# Altium PCB isokey_left.PcbDoc (part 5 of 5)
Units mm, origin at the board's own origin, x right, y up, seen from the top; angles counter-clockwise.
Board outline 154.06 x 134.15 mm, 2 copper layers (Top Layer, Bottom Layer), stack 1.569 mm thick; 140 components, 88 nets, 412 pads, 257 vias.
Unrouted connection lines stored in the file: 18.
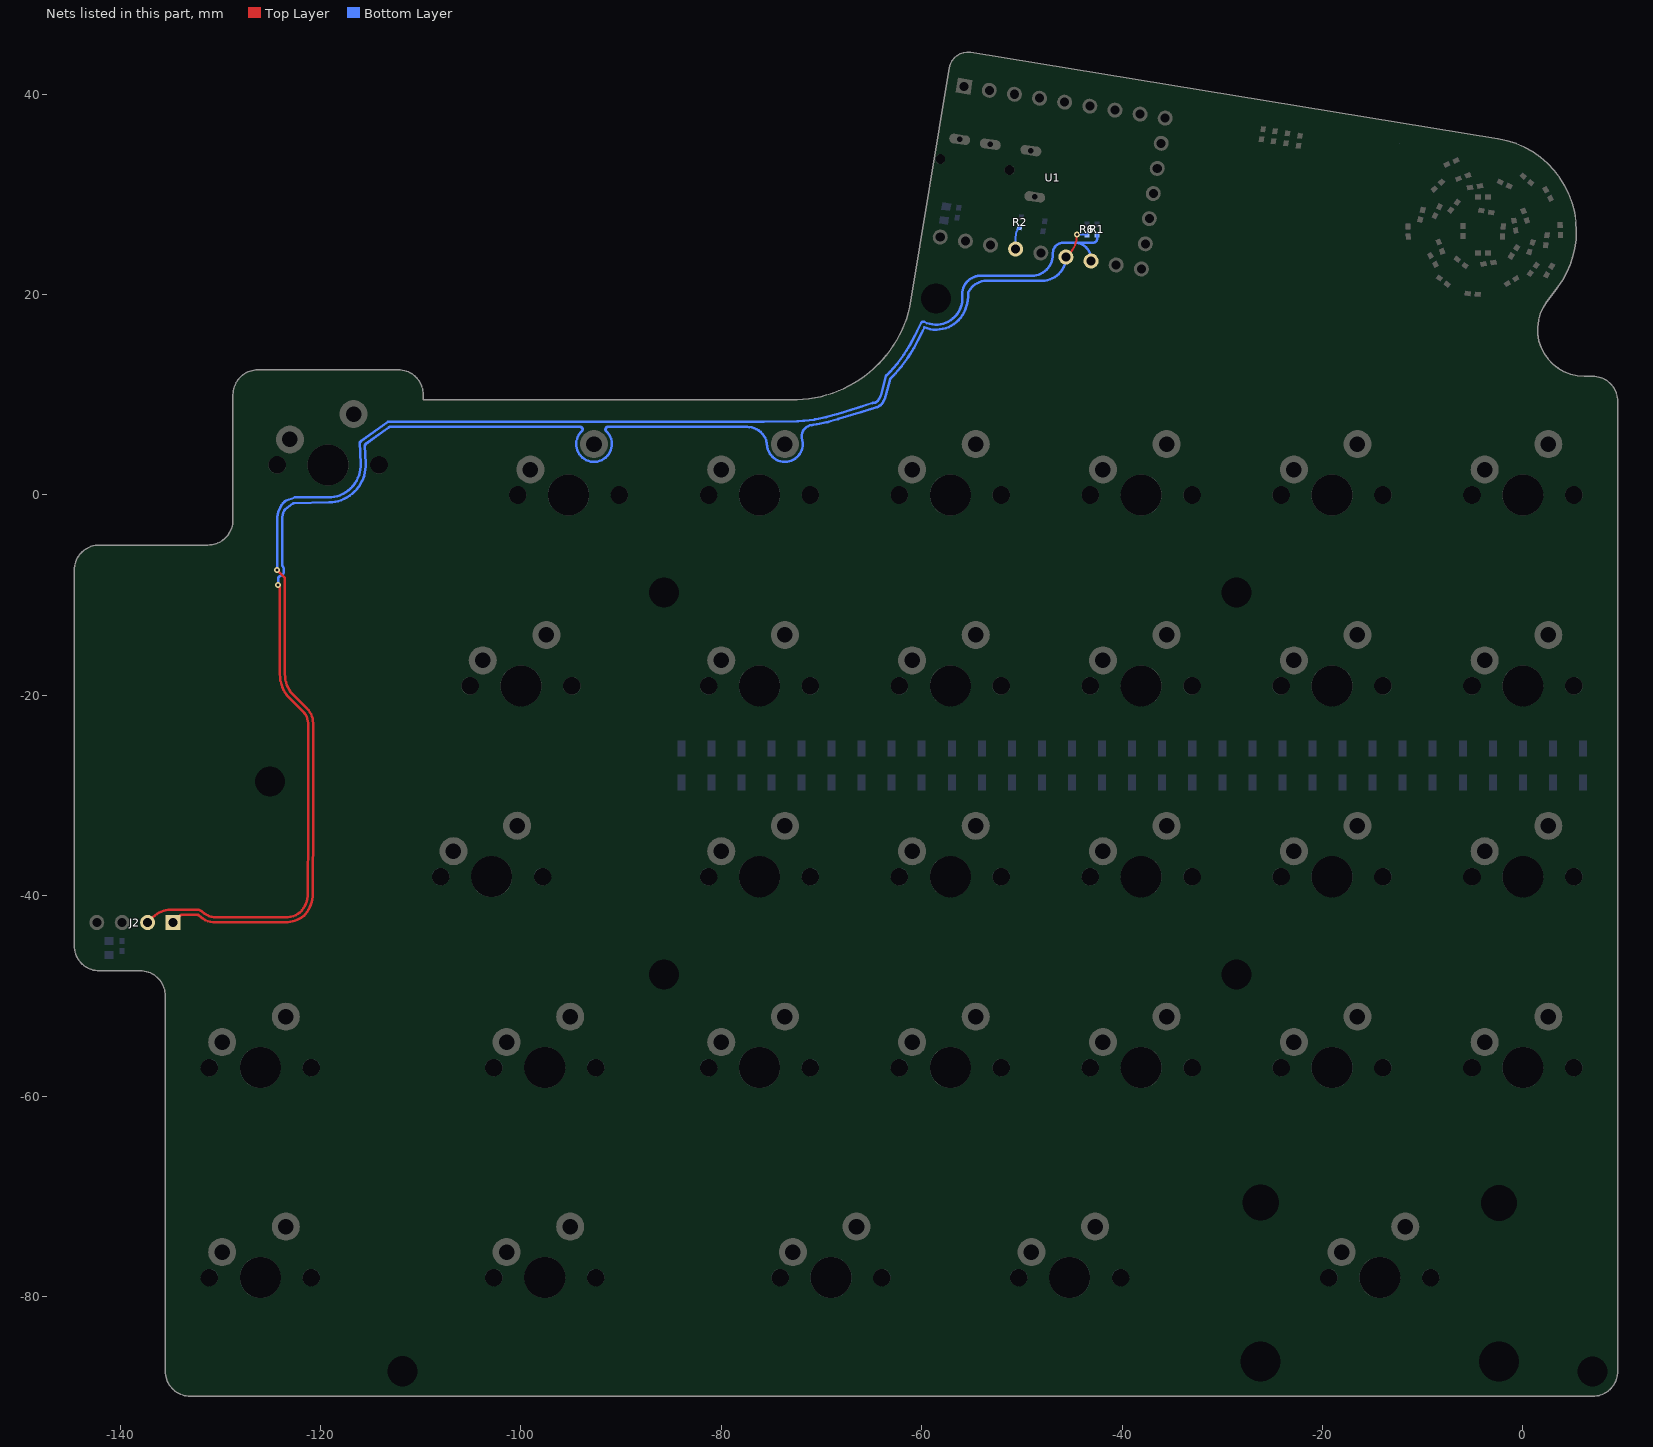
[diagram p5: the nets of this part, all layers, seen from the top]

## Via types
v1: diameter 0.6, hole 0.3, Top Layer to Bottom Layer, 257 vias

## Nets (pads, with @x,y where several pads share a name; then routed paths per layer and width w, separated by ;. In a path a pad name is that pad's centre, name@x,y a point inside that pad or via, vN(x,y) a via of type N, cw(c..) or ccw(c..) an arc to the next point about the centre after c; other vN are vias at no path point) (continued)
SCL1: J2.2 R6.1 U1.17 | length 164.7
  Top Layer w0.2: U1.17@-45.609,23.752 -45.269,24.092 ccw(c-47.065,25.888) -44.525,25.888 v1(-44.525,26)
  Top Layer w0.25: J2.2@-137.259,-42.671 -136.732,-42.144 cw(c-134.936,-43.94) -134.936,-41.4 -132.283,-41.4 cw(c-132.283,-42.083) -131.8,-41.6 ccw(c-130.47,-40.27) -130.47,-42.151 -123.54,-42.151 ccw(c-123.54,-39.611) -122.026,-41.65 ; v1(-124.25,-9) cw(c-124.709,-9.459) -124.06,-9.459 -124.06,-17.888 ccw(c-120.52,-17.888) -123.388,-19.962 ccw(c-122.983,-19.67) -123.387,-19.964 ; -123.387,-19.965 ccw(c-122.983,-19.67) -123.385,-19.967 ccw(c-122.579,-19.375) -123.288,-20.08 ; -123.287,-20.081 -121.619,-21.758 cw(c-121.796,-21.934) -121.604,-21.774 cw(c-122.79,-22.756) -121.25,-22.756 -121.25,-34.082 -121.286,-38.944 ; -122.062,-41.677 -122.03,-41.645 ccw(c-123.826,-39.849) -121.295,-40.061 ccw(c-121.544,-40.04) -121.294,-40.043 -121.286,-38.949
  Bottom Layer w0.2: v1(-44.525,26) R6.1@-43.5,26
  Bottom Layer w0.25: v1(-124.25,-9) -124.25,-8.363 cw(c-124,-8.364) -124.09,-8.131 ccw(c-124.33,-7.5) -123.783,-7.104 cw(c-123.58,-6.959) -123.83,-6.96 -123.83,-2.447 cw(c-121.79,-2.447) -123.613,-1.532 -123.612,-1.53 cw(c-123.391,-1.646) -123.544,-1.448 -122.792,-0.868 -122.756,-0.854 cw(c-122.67,-1.089) -122.676,-0.839 -119.154,-0.749 ccw(c-119.25,3) -116.598,0.348 ccw(c-119.25,3) -115.503,3.15 -115.572,4.903 cw(c-115.322,4.912) -115.467,5.115 -114.478,5.825 -113.185,6.753 cw(c-113.04,6.55) -113.04,6.8 -94.102,6.8 cw(c-94.103,6.55) -93.93,6.369 ccw(c-92.71,5.08) -91.49,6.369 cw(c-91.317,6.55) -91.318,6.8 -77.438,6.8 cw(c-77.438,4.77) -75.537,5.484 cw(c-75.772,5.397) -75.525,5.44 -75.408,4.773 ; -75.408,4.77 cw(c-73.66,5.08) -75.408,4.773 ; -70.472,7.067 -70.81,7 ccw(c-70.81,5.814) -71.996,5.814 ccw(c-71.746,5.814) -71.99,5.762 -71.924,5.449 cw(c-73.66,5.08) -71.996,4.463 cw(c-73.66,5.08) -73.66,3.305 cw(c-73.66,5.08) -75.408,4.773 ; -70.471,7.068 -69.511,7.261 ccw(c-69.609,7.751) -69.509,7.261 ; -69.508,7.261 ccw(c-70.027,9.834) -69.304,7.311 ; -69.301,7.312 -68.359,7.583 ccw(c-68.497,8.063) -68.357,7.583 ; -68.356,7.583 ccw(c-69.084,10.105) -68.33,7.591 ccw(c-68.473,8.07) -68.329,7.591 -66.092,8.263 ccw(c-66.236,8.742) -66.089,8.264 -64.526,8.743 ccw(c-64.87,9.867) -64.355,8.811 ccw(c-64.87,9.867) -63.82,9.34 -63.692,9.595 ccw(c-65.144,10.324) -63.573,9.911 -63.138,11.559 cw(c-62.896,11.495) -63.074,11.671 -62.818,11.927 ccw(c-63.17,12.282) -62.794,11.953 -62.615,12.157 -62.363,12.445 -62.11,12.734 ccw(c-63.521,13.969) -62.013,12.855 ; -62.013,12.855 -61.431,13.642 ccw(c-62.938,14.758) -61.343,13.772 -60.829,14.601 ccw(c-62.421,15.592) -60.763,14.715 -59.988,16.177 ccw(c-60.429,16.411) -59.978,16.196 -59.876,16.41 -59.727,16.723 ccw(c-58.572,19.627) -55.661,18.49 ccw(c-59.794,20.104) -55.357,20.12 ccw(c-59.794,20.104) -55.357,20.122 cw(c-55.107,20.121) -55.337,20.217 cw(c-53.638,19.498) -54.68,21.02 cw(c-53.517,19.321) -53.517,21.38 -47.981,21.38 ccw(c-47.981,23.752) U1.17@-45.609,23.752
SDA1: J2.1 R1.1 U1.16 | length 156.2
  Top Layer w0.25: J2.1@-134.719,-42.671 -134.021,-41.973 cw(c-133.845,-42.15) -133.845,-41.9 -132.309,-41.9 cw(c-132.31,-42.15) -132.136,-41.971 ccw(c-130.47,-40.27) -130.47,-42.651 -123.54,-42.651 ccw(c-123.54,-39.611) -122.56,-42.489 ccw(c-123.54,-39.611) -121.726,-42.05 ccw(c-122.026,-41.65) -121.647,-41.976 -121.526,-41.837 ccw(c-123.826,-39.849) -120.797,-40.104 ccw(c-121.544,-40.04) -120.796,-40.102 ; v1(-124.33,-7.5) -123.633,-8.197 cw(c-123.81,-8.374) -123.56,-8.374 -123.56,-17.888 ccw(c-120.52,-17.888) -122.983,-19.67 ccw(c-122.579,-19.375) -122.933,-19.728 -122.647,-20.015 -121.345,-21.317 cw(c-122.79,-22.756) -120.75,-22.756 -120.75,-34.082 cw(c-121.25,-34.082) -120.75,-34.086 -120.78,-38.091 ; -120.796,-40.101 ccw(c-121.295,-40.061) -120.796,-40.099 ccw(c-121.544,-40.04) -120.794,-40.045 -120.786,-38.953 ccw(c-121.286,-38.949) -120.786,-38.949 -120.78,-38.096
  Bottom Layer w0.25: v1(-124.33,-7.5) -124.33,-2.447 cw(c-121.79,-2.447) -123.586,-0.651 cw(c-121.79,-2.447) -123.584,-0.649 cw(c-123.409,-0.827) -123.495,-0.592 -122.56,-0.25 -119.25,-0.25 ccw(c-119.25,3) -116.27,1.703 ccw(c-119.25,3) -116.003,3.13 -116.086,5.259 -116.008,5.338 cw(c-115.832,5.161) -115.978,5.364 ; -115.978,5.364 -113.287,7.296 -113.213,7.3 cw(c-113.201,7.05) -113.201,7.3 -75.763,7.3 -72.404,7.376 ccw(c-72.452,9.5) -72.337,7.378 ccw(c-72.369,8.002) -72.335,7.378 -71.845,7.405 ; -71.844,7.405 ccw(c-71.921,8.778) -71.841,7.406 ccw(c-71.963,9.527) -71.719,7.416 ccw(c-71.875,8.782) -71.717,7.416 ccw(c-71.788,8.037) -71.715,7.416 -70.741,7.531 ccw(c-70.814,8.151) -70.739,7.531 ccw(c-70.901,8.896) -70.738,7.531 ccw(c-70.988,9.641) -70.571,7.557 ccw(c-70.693,8.171) -70.57,7.558 -69.609,7.751 ccw(c-69.732,8.364) -69.607,7.751 ccw(c-70.027,9.834) -69.442,7.791 ; -69.44,7.792 -68.497,8.063 ; -68.495,8.064 ccw(c-69.084,10.105) -68.473,8.07 -66.236,8.742 -64.953,9.178 cw(c-64.872,8.942) -64.872,9.192 ccw(c-64.87,9.867) -64.266,9.565 -64.139,9.82 ccw(c-65.144,10.324) -64.057,10.037 -63.587,11.817 cw(c-63.345,11.753) -63.523,11.929 -63.17,12.282 -62.487,13.063 ; -62.486,13.064 ccw(c-63.521,13.969) -62.415,13.152 -61.833,13.939 ccw(c-62.938,14.758) -61.768,14.035 -61.511,14.45 -61.253,14.865 ccw(c-62.421,15.592) -61.205,14.949 -60.429,16.411 -60.068,17.169 -60.014,17.223 cw(c-59.838,17.046) -59.729,17.27 ccw(c-58.572,19.627) -55.971,19.269 ccw(c-58.572,19.627) -55.969,19.969 cw(c-55.721,20) -55.971,19.999 -55.971,20.024 cw(c-54.114,20.024) -54.799,21.749 -54.607,21.826 cw(c-54.327,21.13) -54.339,21.88 cw(c-54.331,21.38) -54.338,21.88 ; -54.337,21.88 cw(c-54.305,19.34) -54.305,21.88 -49.028,21.88 ccw(c-49.028,23.998) -46.91,23.998 -46.91,24.149 cw(c-45.87,24.149) -45.87,25.189 -44.75,25.189 ; U1.16@-43.1,23.355 -43.1,23.539 ccw(c-44.75,23.539) -44.75,25.189 ; R1.1@-42.5,26 -42.5,25.559 cw(c-42.87,25.559) -42.87,25.189 -44.75,25.189
SERIAL: R2.1 U1.19 | length 2.3
  Bottom Layer w0.2: U1.19@-50.626,24.547 -50.626,25.77 cw(c-49.269,25.77) R2.1@-50.229,26.729
pads on no net: J1.Un1 J1.Un2 K00_S1.Hole K01_S1.Hole K02_S1.Hole K03_S1.Hole K10_S1.Hole K11_S1.Hole K12_S1.Hole K13_S1.Hole K14_S1.Hole K20_S1.Hole K21_S1.Hole K22_S1.Hole K23_S1.Hole K24_S1.Hole K30_S1.Hole K31_S1.Hole K32_S1.Hole K33_S1.Hole K40_S1.Hole K41_S1.Hole K42_S1.Hole K43_S1.Hole K44_S1.Hole K50_S1.Hole K51_S1.Hole K52_S1.Hole K53_S1.Hole K54_S1.Hole K60_S1.Hole K63_S1.Hole K64_S1.Hole U1.12 U1.13

## Silkscreen, mask and mechanical layers (free items; w line width, h text height)
Top Overlay:
  drawing of 53 lines, arcs and shapes, not listed
  text "v5.1" at -32.507,24.578 h0.55
  text "s" at -32.457,22.245 h2.05
  text "o" at -30.502,22.245 h2.05
  text "I" at -34.178,22.224 h2.05
  text "e" at -32.416,20.028 h2.05
  text "K" at -34.178,20.008 h2.05
  text "y" at -30.433,20.003 h2.05
  text "iso" at -128.074,-19.404 h4.11
  text "K" at -121.5,-20.5 h5.48
  text "Split!" at -125.25,-26.44 h4.5
  text "v5.1" at -126.512,-26.5 h3.5 r90
  text ".prj_name / .prj_status" at -130.25,-41.25 h2
  text "REV..prj_pcb" at 2.75,-79.25 h1.2 r270
  text "D" at 5.661,-80.894 h0.8
  text "B" at 5.661,-83.896 h0.8
Bottom Overlay:
  drawing of 52 lines, arcs and shapes, not listed
  text "v5.1" at -51.727,38.975 h0.32
  text "o" at -52.887,37.626 h1.18
  text "s" at -51.757,37.626 h1.18
  text "I" at -50.761,37.614 h1.18
  text "y" at -52.927,36.33 h1.18
  text "e" at -51.78,36.344 h1.18
  text "K" at -50.761,36.332 h1.18
  text "iso" at -119.594,-24.28 h7.87
  text "K" at -132.18,-26.377 h10.49
  text "Split!" at -125,-37.75 h8.62
  text "v5.1" at -122.585,-37.865 h6.7 r270
  text ".prj_name / .prj_status" at -115.3,-48.9 h2
  text "B" at 4.911,-79.354 h0.8 r180
  text "REV..prj_pcb" at 3.25,-79.5 h1.2 r90
  text "D" at 4.911,-82.356 h0.8 r180
Outline:
  lines w0.15: -142.1,-47.49 -138,-47.49 cw(c-138,-49.99) -135.5,-49.99 -135.5,-87.462 ccw(c-133,-87.462) -133,-89.962 6.969,-89.962 ccw(c6.969,-87.462) 9.469,-87.462 9.469,9.35 ccw(c6.969,9.35) 6.969,11.85 6.116,11.85 5.433,11.901 4.764,12.051 4.124,12.298 3.528,12.637 2.988,13.06 2.516,13.557 2.122,14.119 1.816,14.732 1.602,15.384 1.487,16.06 1.473,16.745 1.559,17.425 1.745,18.085 2.026,18.711 2.395,19.289 3.481,20.737 3.964,21.447 4.38,22.199 4.725,22.985 4.996,23.8 5.191,24.636 5.309,25.487 5.349,26.344 5.301,27.284 5.16,28.214 4.926,29.124 4.601,30.007 4.19,30.853 3.696,31.653 3.123,32.399 2.479,33.085 1.769,33.702 1.001,34.244 0.182,34.707 -0.68,35.084 -1.575,35.374 -2.494,35.572 -55.115,44.167 -55.476,44.19 -55.835,44.142 -56.178,44.025 -56.492,43.844 -56.764,43.605 -56.984,43.317 -57.144,42.992 -57.238,42.642 -61.18,18.781 cw(c-72.87,21.493) -72.452,9.5 -109.751,9.5 -109.751,10 ccw(c-112.251,10) -112.251,12.5 -126.245,12.5 ; -142.1,-5 -131.25,-5 ccw(c-131.25,-2.5) -128.75,-2.5 -128.75,9.995 ; -142.088,-47.49 cw(c-142.088,-44.99) -144.588,-44.99 -144.588,-7.5 cw(c-142.088,-7.5) -142.088,-5 ; -128.745,9.995 cw(c-126.245,9.995) -126.245,12.495
Drawing:
  lines w0.15: -128.75,-4 -126.25,-4 -126.25,-6.499
Assembly Top:
  text "'.Layer_Name'" at 413.3,-210.934 h5
Assembly Bottom:
  text "'.Layer_Name'" at 153.114,-211.342 h5
Note Top:
  text "'.Layer_Name'" at 413.3,-210.934 h5
Note Bottom:
  text "'.Layer_Name'" at 153.114,-211.175 h5
PCB_Note:
  drawing of 367 lines, arcs and shapes, not listed
  text "REV:" at 95.914,85.574 h0.8
  text "DWG. NO." at 71.354,85.495 h0.8
  text "1" at -246.049,85.112 h1.2
  text "2" at -219.049,85.112 h1.2
  text "3" at -194.049,85.112 h1.2
  text "4" at -169.049,85.112 h1.2
  text "5" at -144.049,85.112 h1.2
  text "6" at -119.049,85.112 h1.2
  text "7" at -94.049,85.112 h1.2
  text "8" at -67.049,85.112 h1.2
  text "9" at -38.049,85.112 h1.2
  text "10" at -13.049,85.112 h1.2
  text "11" at 11.951,85.112 h1.2
  text "12" at 36.951,85.112 h1.2
  text "13" at 61.951,85.112 h1.2
  text "15" at 111.951,85.112 h1.2
  text "16" at 141.951,85.112 h1.2
  text ".prj_pcb" at 96.164,84.074 h1.27
  text ".PCB_DWG_NO" at 74.664,83.824 h1.27
  text "T" at -257.031,81.486 h1.3
  text "H" at -255.93,81.486 h1.3
  text "I" at -254.66,81.486 h1.3
  text "S" at -254.152,81.486 h1.3
  text "D" at -252.5,81.486 h1.3
  text "O" at -251.23,81.486 h1.3
  text "C" at -249.833,81.486 h1.3
  text "U" at -248.562,81.486 h1.3
  text "M" at -247.292,81.486 h1.3
  text "E" at -245.81,81.486 h1.3
  text "N" at -244.624,81.486 h1.3
  text "T" at -243.396,81.486 h1.3
  text "A" at -241.787,81.486 h1.3
  text "N" at -240.602,81.486 h1.3
  text "D" at -239.331,81.486 h1.3
  text "T" at -237.595,81.486 h1.3
  text "H" at -236.494,81.486 h1.3
  text "E" at -235.224,81.486 h1.3
  text "D" at -233.573,81.486 h1.3
  text "A" at -232.302,81.486 h1.3
  text "T" at -231.117,81.486 h1.3
  text "A" at -230.058,81.486 h1.3
  text "D" at -228.364,81.486 h1.3
  text "I" at -227.094,81.486 h1.3
  text "S" at -226.628,81.486 h1.3
  text "C" at -225.443,81.486 h1.3
  text "L" at -224.172,81.486 h1.3
  text "O" at -223.198,81.486 h1.3
  text "S" at -221.801,81.486 h1.3
  text "E" at -220.615,81.486 h1.3
  text "D" at -219.43,81.486 h1.3
  text "H" at -217.694,81.486 h1.3
  text "E" at -216.423,81.486 h1.3
  text "R" at -215.238,81.486 h1.3
  text "E" at -214.01,81.486 h1.3
  text "I" at -212.824,81.486 h1.3
  text "N" at -212.316,81.486 h1.3
  text "O" at -210.58,81.486 h1.3
  text "R" at -209.183,81.486 h1.3
  text "REVISIONS" at 95.851,80.657 h1.5
  text "H" at -257.031,79.453 h1.3
  text "E" at -255.761,79.453 h1.3
  text "R" at -254.575,79.453 h1.3
  text "E" at -253.305,79.453 h1.3
  text "W" at -252.162,79.453 h1.3
  text "I" at -250.425,79.453 h1.3
  text "T" at -249.96,79.453 h1.3
  text "H" at -248.859,79.453 h1.3
  text "I" at -247.123,79.453 h1.3
  text "S" at -246.615,79.453 h1.3
  text "T" at -244.963,79.453 h1.3
  text "H" at -243.862,79.453 h1.3
  text "E" at -242.592,79.453 h1.3
  text "P" at -240.94,79.453 h1.3
  text "R" at -239.755,79.453 h1.3
  text "O" at -238.485,79.453 h1.3
  text "P" at -237.112,79.453 h1.3
  text "E" at -235.926,79.453 h1.3
  text "R" at -234.74,79.453 h1.3
  text "T" at -233.512,79.453 h1.3
  text "Y" at -232.412,79.453 h1.3
  text "O" at -230.76,79.453 h1.3
  text "F" at -229.405,79.453 h1.3
  text "A" at -227.796,79.453 h1.3
  text "L" at -226.61,79.453 h1.3
  text "T" at -225.679,79.453 h1.3
  text "I" at -224.578,79.453 h1.3
  text "U" at -224.07,79.453 h1.3
  text "M" at -222.8,79.453 h1.3
  text "L" at -220.852,79.453 h1.3
  text "I" at -219.878,79.453 h1.3
  text "M" at -219.37,79.453 h1.3
  text "I" at -217.93,79.453 h1.3
  text "T" at -217.422,79.453 h1.3
  text "E" at -216.321,79.453 h1.3
  text "D" at -215.135,79.453 h1.3
  text "A" at -213.399,79.453 h1.3
  text "N" at -212.214,79.453 h1.3
  text "D" at -210.943,79.453 h1.3
  text "M" at -209.165,79.453 h1.3
  text "A" at -207.683,79.453 h1.3
  text "Y" at -206.54,79.453 h1.3
  text "ZONE" at 55.592,77.482 h1.5
  text "REV" at 63.974,77.482 h1.5
  text "DATE" at 125.442,77.482 h1.5
  text "B" at -257.031,77.421 h1.3
  text "E" at -255.845,77.421 h1.3
  text "F" at -254.152,77.421 h1.3
  text "R" at -253.051,77.421 h1.3
  text "E" at -251.78,77.421 h1.3
  text "E" at -250.637,77.421 h1.3
  text "L" at -249.452,77.421 h1.3
  text "Y" at -248.478,77.421 h1.3
  text "D" at -246.784,77.421 h1.3
  text "I" at -245.514,77.421 h1.3
  text "S" at -245.048,77.421 h1.3
  text "T" at -243.862,77.421 h1.3
  text "R" at -242.779,77.421 h1.3
  text "I" at -241.551,77.421 h1.3
  text "B" at -241.043,77.421 h1.3
  text "U" at -239.857,77.421 h1.3
  text "T" at -238.587,77.421 h1.3
  text "E" at -237.486,77.421 h1.3
  text "D" at -236.3,77.421 h1.3
  text "I" at -234.564,77.421 h1.3
  text "N" at -234.056,77.421 h1.3
  text "W" at -232.362,77.421 h1.3
  text "H" at -230.626,77.421 h1.3
  text "O" at -229.398,77.421 h1.3
  text "L" at -228.001,77.421 h1.3
  text "E" at -227.027,77.421 h1.3
  text "." at -225.841,77.421 h1.3
  text "N" at -224.867,77.421 h1.3
  text "O" at -223.597,77.421 h1.3
  text "R" at -221.692,77.421 h1.3
  text "I" at -220.464,77.421 h1.3
  text "G" at -219.955,77.421 h1.3
  text "H" at -218.558,77.421 h1.3
  text "T" at -217.33,77.421 h1.3
  text "S" at -216.229,77.421 h1.3
  text "A" at -214.578,77.421 h1.3
  text "R" at -213.392,77.421 h1.3
  text "E" at -212.122,77.421 h1.3
  text "DESCRIPTION" at 89.755,77.355 h1.5
  text "APPROVED" at 138.269,77.355 h1.5
  text "R" at -257.031,75.388 h1.3
  text "E" at -255.761,75.388 h1.3
  text "S" at -254.575,75.388 h1.3
  text "E" at -253.39,75.388 h1.3
  text "R" at -252.204,75.388 h1.3
  text "V" at -250.934,75.388 h1.3
  text "E" at -249.748,75.388 h1.3
  text "D" at -248.562,75.388 h1.3
  text "O" at -246.826,75.388 h1.3
  text "R" at -245.429,75.388 h1.3
  text "E" at -243.65,75.388 h1.3
  text "X" at -242.465,75.388 h1.3
  text "P" at -241.322,75.388 h1.3
  text "R" at -240.136,75.388 h1.3
  text "E" at -238.866,75.388 h1.3
  text "S" at -237.68,75.388 h1.3
  text "S" at -236.494,75.388 h1.3
  text "O" at -234.843,75.388 h1.3
  text "R" at -233.446,75.388 h1.3
  text "I" at -231.71,75.388 h1.3
  text "M" at -231.201,75.388 h1.3
  text "P" at -229.719,75.388 h1.3
  text "L" at -228.534,75.388 h1.3
  text "I" at -227.602,75.388 h1.3
  text "E" at -227.094,75.388 h1.3
  text "D" at -225.908,75.388 h1.3
  text "W" at -224.215,75.388 h1.3
  text "A" at -222.479,75.388 h1.3
  text "R" at -221.293,75.388 h1.3
  text "A" at -220.023,75.388 h1.3
  text "N" at -218.837,75.388 h1.3
  text "T" at -217.609,75.388 h1.3
  text "E" at -216.508,75.388 h1.3
  text "E" at -215.322,75.388 h1.3
  text "G" at -213.767,75.388 h1.3
  text "I" at -212.369,75.388 h1.3
  text "V" at -211.861,75.388 h1.3
  text "E" at -210.676,75.388 h1.3
  text "N" at -209.49,75.388 h1.3
  text "." at -208.262,75.388 h1.3
  text "A" at 64.736,74.053 h1.5
  text "ORIGINAL" at 91.66,74.053 h1.5
  text "A" at -259.049,64.112 h1.2
  text "A" at 152.951,64.112 h1.2
  text "PCB Build Notes:" at -244.036,45.624 h3
  text "B" at -259.049,31.112 h1.2
  text "B" at 152.951,31.112 h1.2
  text "1. Layers: '.pcb_layer_count' / 2. Base Material: '.pcb_material' / 3. Plating Finish: '.pcb_finish' / 4. Silkscreen Color: '.pcb_silkscreen_color' / 5. Solder Color: '.pcb_solder_color'" at -240.486,21.824 h2.5
  text "Other Notes:" at -243.336,14.624 h3
  text "C" at -259.049,-4.763 h1.2
  text "C" at 152.951,-4.763 h1.2
  text "Layer" at -241.562,-12.926 h1.5
  text "Name" at -232.756,-12.926 h1.5
  text "Material" at -206.069,-12.926 h1.5
  text "Thickness" at -192.435,-12.926 h1.5
  text "Constant" at -179.408,-12.926 h1.5
  text "Board Layer Stack" at -166.989,-12.926 h1.5
  text "Top Overlay" at -232.756,-15.926 h1.5
  text "Top Solder" at -232.756,-18.926 h1.5
  text "SM-001" at -206.069,-18.926 h1.5
  text "0.025mm" at -192.435,-18.926 h1.5
  text "4" at -179.408,-18.926 h1.5
  text "Top Copper Plating" at -232.756,-21.926 h1.5
  text "PbSn" at -206.069,-21.926 h1.5
  text "0.020mm" at -192.435,-21.926 h1.5
  text "1" at -241.562,-24.926 h1.5
  text "Top Layer" at -232.756,-24.926 h1.5
  text "CF-004" at -206.069,-24.926 h1.5
  text "0.035mm" at -192.435,-24.926 h1.5
  text "Dielectric 1" at -232.756,-27.926 h1.5
  text "Core-043" at -206.069,-27.926 h1.5
  text "1.499mm" at -192.435,-27.926 h1.5
  text "4.3" at -179.408,-27.926 h1.5
  text "2" at -241.562,-30.926 h1.5
  text "Bottom Layer" at -232.756,-30.926 h1.5
  text "CF-004" at -206.069,-30.926 h1.5
  text "0.035mm" at -192.435,-30.926 h1.5
  text "Bottom Copper Plating" at -232.756,-33.926 h1.5
  text "PbSn" at -206.069,-33.926 h1.5
  text "0.020mm" at -192.435,-33.926 h1.5
  text "Bottom Solder" at -232.756,-36.926 h1.5
  text "SM-001" at -206.069,-36.926 h1.5
  text "0.025mm" at -192.435,-36.926 h1.5
  text "4" at -179.408,-36.926 h1.5
  text "Bottom Overlay" at -232.756,-39.926 h1.5
  text "D" at -259.049,-40.638 h1.2
  text "D" at 152.951,-40.638 h1.2
  text "E" at -259.049,-76.513 h1.2
  text "E" at 152.951,-76.513 h1.2
  text "F" at -259.049,-112.388 h1.2
  text "F" at 152.951,-112.388 h1.2
  text ".pcb_organization" at 116.511,-147.772 h1.2
  text "PROJECT" at 39.105,-147.798 h1.2
  text "DATE" at 63.949,-147.798 h1.2
  text "G" at -259.049,-148.263 h1.2
  text "G" at 152.951,-148.263 h1.2
  text "BOARD:" at 20.477,-149.83 h1.2
  text ".pcb_address1" at 120.311,-150.158 h1.2
  text ".prj_name" at 22.355,-151.862 h1.25
  text ".prj_date" at 60.647,-151.862 h1
  text ".pcb_address2" at 120.311,-152.444 h1.2
  text "'.pcb_address3' - '.pcb_address4'" at 116.511,-154.63 h1.2
  text "STATUS:" at 20.477,-154.91 h1.2
  text "-  '.prj_status' -" at 22.405,-157.34 h1.5
  text "TITLE:" at 72.432,-157.725 h1.2
  text "VARIANT:" at 20.477,-159.99 h1.2
  text "PART NO." at -14.466,-160.676 h1.2
  text ".prj_part_number" at -1.512,-160.676 h1.2
  text ".prj_name_long" at 76.75,-161.535 h2.54
  text ".VariantName" at 22.355,-162.59 h1.25
  text "PCB PART NO." at -14.466,-162.782 h1.2
  text ".pcb_part_number" at -1.512,-162.782 h1.2
  text "DWG. NO." at 152.835,-163.49 h0.8 r270
  text "UNLESS OTHERWISE SPECIFIED DIMENSIONS" at -13.958,-165.449 h1.1
  text "APPROVALS" at 39.105,-165.502 h1.2
  text "DATE" at 63.949,-165.502 h1.2
  text "iso" at 126.881,-166.188 h4.11
  text ".pcb_title1" at 76.75,-166.708 h2.54
  text ".PCB_DWG_NO" at 151.164,-166.801 h1.27 r270
  text "K" at 133.454,-167.283 h5.48
  text "AND TOLERANCE ARE IN INCHES AND" at -12.561,-167.354 h1.1
  text "DESIGNER:" at 20.477,-167.534 h1.2
  text "APPLY TO THE FINISHED PART" at -9.767,-169.132 h1.1
  text ".PCB_DESIGNER" at 22.355,-169.566 h1.25
  text ".PCB_DESIGNER_APP_DATE" at 60.647,-169.566 h1
  text ".pcb_title2" at 76.75,-170.845 h2.54
  text "TOLERANCE ON:" at -3.671,-172.307 h1.2
  text "ENGINEER:" at 20.477,-172.614 h1.2
  text ".PCB_ENGINEER_APP_DATE" at 60.647,-174.392 h1
  text "2 DEC. PLACE" at -13.958,-174.593 h1
  text "3 DEC. PLACE" at -2.401,-174.593 h1
  text "ANGLES" at 11.188,-174.593 h1
  text ".PCB_ENGINEER" at 22.355,-174.646 h1.25
  text "LICENSE:" at 72.432,-175.101 h1.2
  text "CHECKER:" at 20.477,-177.694 h1.2
  text ".PCB_2_DEC_TOL" at -12.561,-178.53 h1.5
  text ".PCB_3_DEC_TOL" at -1.512,-178.53 h1.5
  text ".PCB_ANG_TOL" at 10.299,-178.53 h1.5
  text ".prj_license" at 77,-178.96 h2.54
  text ".PCB_CHECKER_APP_DATE" at 60.596,-179.573 h1
  text ".PCB_CHECKER" at 22.355,-179.726 h1.25
  text "THIRD ANGLE PROJECTION" at -33.592,-180.056 h1
  text "MATERIAL:" at -13.958,-182.164 h1.2
  text "LAYER:" at 72.432,-183.178 h1.2
  text "REFERENCE DOCUMENTS" at 36.629,-183.282 h1.2
  text "H" at -259.049,-184.138 h1.2
  text "BOM:" at 20.477,-185.822 h1.2
  text "SEE NOTES" at -4.661,-187.219 h1.5
  text "REV:" at 152.914,-188.051 h0.8 r270
  text ".DOC_NO_BOM" at 42.105,-188.108 h1.5
  text ".prj_pcb" at 151.414,-188.301 h1.27 r270
  text "ASSY DWG:" at 20.477,-190.648 h1.2
  text ".DOC_NO_ASSY_DWG" at 42.105,-192.934 h1.5
  text "SIZE:" at 73.956,-193.77 h1.2
  text "CAGE CODE:" at 80.179,-193.77 h1.2
  text "DWG NO:" at 105.579,-193.77 h1.2
  text "REV:" at 145.203,-193.77 h1.2
  text "FAB DWG:" at 20.477,-195.474 h1.2
  text ".PCB_DWG_NO" at 110.914,-197.426 h2.54
  text ".DOC_NO_FAB_DWG" at 42.105,-197.633 h1.5
  text "A3" at 73.804,-197.695 h2.54
  text ".CAGE_CODE" at 84.497,-197.707 h2.54
  text ".prj_pcb" at 146.527,-197.695 h2.54
  text "SCHEMATIC:" at 20.477,-200.3 h1.2
  text "PRINT DATE:" at -14.161,-200.325 h1.2
  text "SCALE:" at 72.432,-201.771 h1.2
  text "FILE NAME:" at 87.799,-201.773 h1.2
  text "SHEET:" at 131.995,-201.773 h1.2
  text ".DOC_NO_SCH_DWG" at 42.105,-202.586 h1.5
  text "'.Print_Date', '.Print_Time'" at -11.586,-202.676 h1.5
  text ".PCB_FILE_NAME_NO_PATH" at 96.511,-202.916 h1.5
  text ".PCB_SCALE" at 79.29,-203.041 h1.5
  text "OF" at 143.425,-203.043 h1.2
  text "DOC-104 REV A" at -257.336,-204.745 h0.55
  text "1" at -246.049,-205.888 h1.2
  text "2" at -219.049,-205.888 h1.2
  text "3" at -194.049,-205.888 h1.2
  text "4" at -169.049,-205.888 h1.2
  text "5" at -144.049,-205.888 h1.2
  text "6" at -119.049,-205.888 h1.2
  text "7" at -94.049,-205.888 h1.2
  text "8" at -67.049,-205.888 h1.2
  text "9" at -38.049,-205.888 h1.2
  text "10" at -13.049,-205.888 h1.2
  text "11" at 11.951,-205.888 h1.2
  text "12" at 36.951,-205.888 h1.2
  text "13" at 61.951,-205.888 h1.2
  text "14" at 86.951,-205.888 h1.2
  text "15" at 111.951,-205.888 h1.2
  text "16" at 141.951,-205.888 h1.2
Top TitleBlock:
  drawing of 136 lines, arcs and shapes, not listed
  text "REV:" at 95.914,85.596 h0.8
  text "DWG. NO." at 71.354,85.517 h0.8
  text "1" at -246.049,85.133 h1.2
  text "2" at -219.049,85.133 h1.2
  text "3" at -194.049,85.133 h1.2
  text "4" at -169.049,85.133 h1.2
  text "5" at -144.049,85.133 h1.2
  text "6" at -119.049,85.133 h1.2
  text "7" at -94.049,85.133 h1.2
  text "8" at -67.049,85.133 h1.2
  text "9" at -38.049,85.133 h1.2
  text "10" at -13.049,85.133 h1.2
  text "11" at 11.951,85.133 h1.2
  text "12" at 36.951,85.133 h1.2
  text "13" at 61.951,85.133 h1.2
  text "15" at 111.951,85.133 h1.2
  text "16" at 141.951,85.133 h1.2
  text ".prj_pcb" at 96.164,84.096 h1.27
  text ".PCB_DWG_NO" at 74.664,83.846 h1.27
  text "T" at -257.031,81.507 h1.3
  text "H" at -255.93,81.507 h1.3
  text "I" at -254.66,81.507 h1.3
  text "S" at -254.152,81.507 h1.3
  text "D" at -252.5,81.507 h1.3
  text "O" at -251.23,81.507 h1.3
  text "C" at -249.833,81.507 h1.3
  text "U" at -248.562,81.507 h1.3
  text "M" at -247.292,81.507 h1.3
  text "E" at -245.81,81.507 h1.3
  text "N" at -244.624,81.507 h1.3
  text "T" at -243.396,81.507 h1.3
  text "A" at -241.787,81.507 h1.3
  text "N" at -240.602,81.507 h1.3
  text "D" at -239.331,81.507 h1.3
  text "T" at -237.595,81.507 h1.3
  text "H" at -236.494,81.507 h1.3
  text "E" at -235.224,81.507 h1.3
  text "D" at -233.573,81.507 h1.3
  text "A" at -232.302,81.507 h1.3
  text "T" at -231.117,81.507 h1.3
  text "A" at -230.058,81.507 h1.3
  text "D" at -228.364,81.507 h1.3
  text "I" at -227.094,81.507 h1.3
  text "S" at -226.628,81.507 h1.3
  text "C" at -225.443,81.507 h1.3
  text "L" at -224.172,81.507 h1.3
  text "O" at -223.198,81.507 h1.3
  text "S" at -221.801,81.507 h1.3
  text "E" at -220.615,81.507 h1.3
  text "D" at -219.43,81.507 h1.3
  text "H" at -217.694,81.507 h1.3
  text "E" at -216.423,81.507 h1.3
  text "R" at -215.238,81.507 h1.3
  text "E" at -214.01,81.507 h1.3
  text "I" at -212.824,81.507 h1.3
  text "N" at -212.316,81.507 h1.3
  text "O" at -210.58,81.507 h1.3
  text "R" at -209.183,81.507 h1.3
  text "REVISIONS" at 95.851,80.679 h1.5
  text "H" at -257.031,79.475 h1.3
  text "E" at -255.761,79.475 h1.3
  text "R" at -254.575,79.475 h1.3
  text "E" at -253.305,79.475 h1.3
  text "W" at -252.162,79.475 h1.3
  text "I" at -250.425,79.475 h1.3
  text "T" at -249.96,79.475 h1.3
  text "H" at -248.859,79.475 h1.3
  text "I" at -247.123,79.475 h1.3
  text "S" at -246.615,79.475 h1.3
  text "T" at -244.963,79.475 h1.3
  text "H" at -243.862,79.475 h1.3
  text "E" at -242.592,79.475 h1.3
  text "P" at -240.94,79.475 h1.3
  text "R" at -239.755,79.475 h1.3
  text "O" at -238.485,79.475 h1.3
  text "P" at -237.112,79.475 h1.3
  text "E" at -235.926,79.475 h1.3
  text "R" at -234.74,79.475 h1.3
  text "T" at -233.512,79.475 h1.3
  text "Y" at -232.412,79.475 h1.3
  text "O" at -230.76,79.475 h1.3
  text "F" at -229.405,79.475 h1.3
  text "A" at -227.796,79.475 h1.3
  text "L" at -226.61,79.475 h1.3
  text "T" at -225.679,79.475 h1.3
  text "I" at -224.578,79.475 h1.3
  text "U" at -224.07,79.475 h1.3
  text "M" at -222.8,79.475 h1.3
  text "L" at -220.852,79.475 h1.3
  text "I" at -219.878,79.475 h1.3
  text "M" at -219.37,79.475 h1.3
  text "I" at -217.93,79.475 h1.3
  text "T" at -217.422,79.475 h1.3
  text "E" at -216.321,79.475 h1.3
  text "D" at -215.135,79.475 h1.3
  text "A" at -213.399,79.475 h1.3
  text "N" at -212.214,79.475 h1.3
  text "D" at -210.943,79.475 h1.3
  text "M" at -209.165,79.475 h1.3
  text "A" at -207.683,79.475 h1.3
  text "Y" at -206.54,79.475 h1.3
  text "ZONE" at 55.592,77.504 h1.5
  text "REV" at 63.974,77.504 h1.5
  text "DATE" at 125.442,77.504 h1.5
  text "B" at -257.031,77.442 h1.3
  text "E" at -255.845,77.442 h1.3
  text "F" at -254.152,77.442 h1.3
  text "R" at -253.051,77.442 h1.3
  text "E" at -251.78,77.442 h1.3
  text "E" at -250.637,77.442 h1.3
  text "L" at -249.452,77.442 h1.3
  text "Y" at -248.478,77.442 h1.3
  text "D" at -246.784,77.442 h1.3
  text "I" at -245.514,77.442 h1.3
  text "S" at -245.048,77.442 h1.3
  text "T" at -243.862,77.442 h1.3
  text "R" at -242.779,77.442 h1.3
  text "I" at -241.551,77.442 h1.3
  text "B" at -241.043,77.442 h1.3
  text "U" at -239.857,77.442 h1.3
  text "T" at -238.587,77.442 h1.3
  text "E" at -237.486,77.442 h1.3
  text "D" at -236.3,77.442 h1.3
  text "I" at -234.564,77.442 h1.3
  text "N" at -234.056,77.442 h1.3
  text "W" at -232.362,77.442 h1.3
  text "H" at -230.626,77.442 h1.3
  text "O" at -229.398,77.442 h1.3
  text "L" at -228.001,77.442 h1.3
  text "E" at -227.027,77.442 h1.3
  text "." at -225.841,77.442 h1.3
  text "N" at -224.867,77.442 h1.3
  text "O" at -223.597,77.442 h1.3
  text "R" at -221.692,77.442 h1.3
  text "I" at -220.464,77.442 h1.3
  text "G" at -219.955,77.442 h1.3
  text "H" at -218.558,77.442 h1.3
  text "T" at -217.33,77.442 h1.3
  text "S" at -216.229,77.442 h1.3
  text "A" at -214.578,77.442 h1.3
  text "R" at -213.392,77.442 h1.3
  text "E" at -212.122,77.442 h1.3
  text "DESCRIPTION" at 89.755,77.377 h1.5
  text "APPROVED" at 138.269,77.377 h1.5
  text "R" at -257.031,75.41 h1.3
  text "E" at -255.761,75.41 h1.3
  text "S" at -254.575,75.41 h1.3
  text "E" at -253.39,75.41 h1.3
  text "R" at -252.204,75.41 h1.3
  text "V" at -250.934,75.41 h1.3
  text "E" at -249.748,75.41 h1.3
  text "D" at -248.562,75.41 h1.3
  text "O" at -246.826,75.41 h1.3
  text "R" at -245.429,75.41 h1.3
  text "E" at -243.65,75.41 h1.3
  text "X" at -242.465,75.41 h1.3
  text "P" at -241.322,75.41 h1.3
  text "R" at -240.136,75.41 h1.3
  text "E" at -238.866,75.41 h1.3
  text "S" at -237.68,75.41 h1.3
  text "S" at -236.494,75.41 h1.3
  text "O" at -234.843,75.41 h1.3
  text "R" at -233.446,75.41 h1.3
  text "I" at -231.71,75.41 h1.3
  text "M" at -231.201,75.41 h1.3
  text "P" at -229.719,75.41 h1.3
  text "L" at -228.534,75.41 h1.3
  text "I" at -227.602,75.41 h1.3
  text "E" at -227.094,75.41 h1.3
  text "D" at -225.908,75.41 h1.3
  text "W" at -224.215,75.41 h1.3
  text "A" at -222.479,75.41 h1.3
  text "R" at -221.293,75.41 h1.3
  text "A" at -220.023,75.41 h1.3
  text "N" at -218.837,75.41 h1.3
  text "T" at -217.609,75.41 h1.3
  text "E" at -216.508,75.41 h1.3
  text "E" at -215.322,75.41 h1.3
  text "G" at -213.767,75.41 h1.3
  text "I" at -212.369,75.41 h1.3
  text "V" at -211.861,75.41 h1.3
  text "E" at -210.676,75.41 h1.3
  text "N" at -209.49,75.41 h1.3
  text "." at -208.262,75.41 h1.3
  text "A" at 64.736,74.075 h1.5
  text "ORIGINAL" at 91.66,74.075 h1.5
  text "A" at -259.049,64.133 h1.2
  text "A" at 152.951,64.133 h1.2
  text "B" at -259.049,31.133 h1.2
  text "B" at 152.951,31.133 h1.2
  text "C" at -259.049,-4.742 h1.2
  text "C" at 152.951,-4.742 h1.2
  text "D" at -259.049,-40.617 h1.2
  text "D" at 152.951,-40.617 h1.2
  text "E" at -259.049,-76.492 h1.2
  text "E" at 152.951,-76.492 h1.2
  text "F" at -259.049,-112.367 h1.2
  text "F" at 152.951,-112.367 h1.2
  text "PROJECT" at 39.105,-147.798 h1.2
  text "DATE" at 63.949,-147.798 h1.2
  text ".pcb_organization" at 120.311,-147.872 h1.2
  text "G" at -259.049,-148.242 h1.2
  text "G" at 152.951,-148.242 h1.2
  text "BOARD:" at 20.477,-149.83 h1.2
  text ".pcb_address1" at 120.311,-150.158 h1.2
  text ".prj_name" at 22.355,-151.862 h1.25
  text ".prj_date" at 60.647,-151.862 h1
  text ".pcb_address2" at 120.311,-152.444 h1.2
  text "'.pcb_address3' - '.pcb_address4'" at 120.311,-154.73 h1.2
  text "STATUS:" at 20.477,-154.91 h1.2
  text "-  '.prj_status' -" at 22.405,-157.34 h1.5
  text "TITLE:" at 72.432,-157.725 h1.2
  text "VARIANT:" at 20.477,-159.99 h1.2
  text "PART NO." at -14.466,-160.676 h1.2
  text ".prj_part_number" at -1.512,-160.676 h1.2
  text ".prj_name_long" at 76.75,-161.535 h2.54
  text ".VariantName" at 22.355,-162.59 h1.25
  text "PCB PART NO." at -14.466,-162.782 h1.2
  text ".pcb_part_number" at -1.512,-162.782 h1.2
  text "DWG. NO." at 152.835,-163.468 h0.8 r270
  text "UNLESS OTHERWISE SPECIFIED DIMENSIONS" at -13.958,-165.449 h1.1
  text "APPROVALS" at 39.105,-165.502 h1.2
  text "DATE" at 63.949,-165.502 h1.2
  text ".pcb_title1" at 76.75,-166.708 h2.54
  text ".PCB_DWG_NO" at 151.164,-166.779 h1.27 r270
  text "AND TOLERANCE ARE IN INCHES AND" at -12.561,-167.354 h1.1
  text "DESIGNER:" at 20.477,-167.534 h1.2
  text "APPLY TO THE FINISHED PART" at -9.767,-169.132 h1.1
  text ".PCB_DESIGNER" at 22.355,-169.566 h1.25
  text ".PCB_DESIGNER_APP_DATE" at 60.647,-169.566 h1
  text ".pcb_title2" at 76.75,-170.845 h2.54
  text "TOLERANCE ON:" at -3.671,-172.307 h1.2
  text "ENGINEER:" at 20.477,-172.614 h1.2
  text ".PCB_ENGINEER_APP_DATE" at 60.647,-174.392 h1
  text "2 DEC. PLACE" at -13.958,-174.593 h1
  text "3 DEC. PLACE" at -2.401,-174.593 h1
  text "ANGLES" at 11.188,-174.593 h1
  text ".PCB_ENGINEER" at 22.355,-174.646 h1.25
  text "LICENSE:" at 72.432,-175.101 h1.2
  text "CHECKER:" at 20.477,-177.694 h1.2
  text ".PCB_2_DEC_TOL" at -12.561,-178.53 h1.5
  text ".PCB_3_DEC_TOL" at -1.512,-178.53 h1.5
  text ".PCB_ANG_TOL" at 10.299,-178.53 h1.5
  text ".prj_license" at 77,-178.96 h2.54
  text ".PCB_CHECKER_APP_DATE" at 60.596,-179.573 h1
  text ".PCB_CHECKER" at 22.355,-179.726 h1.25
  text "THIRD ANGLE PROJECTION" at -33.592,-180.056 h1
  text "MATERIAL:" at -13.958,-182.164 h1.2
  text "LAYER:" at 72.432,-183.178 h1.2
  text "REFERENCE DOCUMENTS" at 36.629,-183.282 h1.2
  text "H" at -259.049,-184.117 h1.2
  text "BOM:" at 20.477,-185.822 h1.2
  text "SEE NOTES" at -4.661,-187.219 h1.5
  text "REV:" at 152.914,-188.029 h0.8 r270
  text ".DOC_NO_BOM" at 22.605,-188.108 h1.5
  text ".prj_pcb" at 151.414,-188.279 h1.27 r270
  text "ASSY DWG:" at 20.477,-190.648 h1.2
  text ".DOC_NO_ASSY_DWG" at 22.605,-192.934 h1.5
  text "SIZE:" at 73.956,-193.77 h1.2
  text "CAGE CODE:" at 80.179,-193.77 h1.2
  text "DWG NO:" at 105.579,-193.77 h1.2
  text "REV:" at 145.203,-193.77 h1.2
  text "FAB DWG:" at 20.477,-195.474 h1.2
  text ".PCB_DWG_NO" at 110.914,-197.426 h2.54
  text ".DOC_NO_FAB_DWG" at 22.605,-197.633 h1.5
  text "A3" at 73.804,-197.695 h2.54
  text ".CAGE_CODE" at 84.497,-197.707 h2.54
  text ".prj_pcb" at 146.527,-197.695 h2.54
  text "SCHEMATIC:" at 20.477,-200.3 h1.2
  text "PRINT DATE:" at -14.161,-200.325 h1.2
  text "SCALE:" at 72.432,-201.771 h1.2
  text "FILE NAME:" at 87.799,-201.773 h1.2
  text "SHEET:" at 131.995,-201.773 h1.2
  text ".DOC_NO_SCH_DWG" at 22.605,-202.586 h1.5
  text "'.Print_Date', '.Print_Time'" at -11.586,-202.676 h1.5
  text ".PCB_FILE_NAME_NO_PATH" at 96.511,-202.916 h1.5
  text ".PCB_SCALE" at 79.29,-203.041 h1.5
  text "OF" at 143.425,-203.043 h1.2
  text "DOC-104 REV A" at -257.336,-204.723 h0.55
  text "1" at -246.049,-205.867 h1.2
  text "2" at -219.049,-205.867 h1.2
  text "3" at -194.049,-205.867 h1.2
  text "4" at -169.049,-205.867 h1.2
  text "5" at -144.049,-205.867 h1.2
  text "6" at -119.049,-205.867 h1.2
  text "7" at -94.049,-205.867 h1.2
  text "8" at -67.049,-205.867 h1.2
  text "9" at -38.049,-205.867 h1.2
  text "10" at -13.049,-205.867 h1.2
  text "11" at 11.951,-205.867 h1.2
  text "12" at 36.951,-205.867 h1.2
  text "13" at 61.951,-205.867 h1.2
  text "14" at 86.951,-205.867 h1.2
  text "15" at 111.951,-205.867 h1.2
  text "16" at 141.951,-205.867 h1.2
Bottom TitleBlock:
  drawing of 135 lines, arcs and shapes, not listed
  text "REV:" at -202.586,85.603 h0.8
  text "DWG. NO." at -178.025,85.524 h0.8
  text "16" at -248.623,85.14 h1.2
  text "15" at -218.623,85.14 h1.2
  text "13" at -168.623,85.14 h1.2
  text "12" at -143.623,85.14 h1.2
  text "11" at -118.623,85.14 h1.2
  text "10" at -93.623,85.14 h1.2
  text "9" at -68.623,85.14 h1.2
  text "8" at -39.623,85.14 h1.2
  text "7" at -12.623,85.14 h1.2
  text "6" at 12.377,85.14 h1.2
  text "5" at 37.377,85.14 h1.2
  text "4" at 62.377,85.14 h1.2
  text "3" at 87.377,85.14 h1.2
  text "2" at 112.377,85.14 h1.2
  text "1" at 139.377,85.14 h1.2
  text ".prj_pcb" at -202.836,84.103 h1.27
  text ".PCB_DWG_NO" at -181.336,83.853 h1.27
  text "R" at 102.511,81.514 h1.3
  text "O" at 103.908,81.514 h1.3
  text "N" at 105.644,81.514 h1.3
  text "I" at 106.152,81.514 h1.3
  text "E" at 107.338,81.514 h1.3
  text "R" at 108.566,81.514 h1.3
  text "E" at 109.752,81.514 h1.3
  text "H" at 111.022,81.514 h1.3
  text "D" at 112.758,81.514 h1.3
  text "E" at 113.944,81.514 h1.3
  text "S" at 115.129,81.514 h1.3
  text "O" at 116.527,81.514 h1.3
  text "L" at 117.501,81.514 h1.3
  text "C" at 118.771,81.514 h1.3
  text "S" at 119.957,81.514 h1.3
  text "I" at 120.422,81.514 h1.3
  text "D" at 121.693,81.514 h1.3
  text "A" at 123.386,81.514 h1.3
  text "T" at 124.445,81.514 h1.3
  text "A" at 125.631,81.514 h1.3
  text "D" at 126.901,81.514 h1.3
  text "E" at 128.552,81.514 h1.3
  text "H" at 129.823,81.514 h1.3
  text "T" at 130.924,81.514 h1.3
  text "D" at 132.66,81.514 h1.3
  text "N" at 133.93,81.514 h1.3
  text "A" at 135.116,81.514 h1.3
  text "T" at 136.725,81.514 h1.3
  text "N" at 137.953,81.514 h1.3
  text "E" at 139.138,81.514 h1.3
  text "M" at 140.62,81.514 h1.3
  text "U" at 141.891,81.514 h1.3
  text "C" at 143.161,81.514 h1.3
  text "O" at 144.558,81.514 h1.3
  text "D" at 145.829,81.514 h1.3
  text "S" at 147.48,81.514 h1.3
  text "I" at 147.988,81.514 h1.3
  text "H" at 149.258,81.514 h1.3
  text "T" at 150.359,81.514 h1.3
  text "REVISIONS" at -202.523,80.686 h1.5
  text "Y" at 99.868,79.481 h1.3
  text "A" at 101.011,79.481 h1.3
  text "M" at 102.493,79.481 h1.3
  text "D" at 104.272,79.481 h1.3
  text "N" at 105.542,79.481 h1.3
  text "A" at 106.727,79.481 h1.3
  text "D" at 108.464,79.481 h1.3
  text "E" at 109.649,79.481 h1.3
  text "T" at 110.75,79.481 h1.3
  text "I" at 111.258,79.481 h1.3
  text "M" at 112.698,79.481 h1.3
  text "I" at 113.206,79.481 h1.3
  text "L" at 114.18,79.481 h1.3
  text "M" at 116.128,79.481 h1.3
  text "U" at 117.398,79.481 h1.3
  text "I" at 117.906,79.481 h1.3
  text "T" at 119.007,79.481 h1.3
  text "L" at 119.939,79.481 h1.3
  text "A" at 121.124,79.481 h1.3
  text "F" at 122.733,79.481 h1.3
  text "O" at 124.088,79.481 h1.3
  text "Y" at 125.74,79.481 h1.3
  text "T" at 126.841,79.481 h1.3
  text "R" at 128.069,79.481 h1.3
  text "E" at 129.254,79.481 h1.3
  text "P" at 130.44,79.481 h1.3
  text "O" at 131.813,79.481 h1.3
  text "R" at 133.083,79.481 h1.3
  text "P" at 134.269,79.481 h1.3
  text "E" at 135.92,79.481 h1.3
  text "H" at 137.19,79.481 h1.3
  text "T" at 138.291,79.481 h1.3
  text "S" at 139.943,79.481 h1.3
  text "I" at 140.451,79.481 h1.3
  text "H" at 142.187,79.481 h1.3
  text "T" at 143.288,79.481 h1.3
  text "I" at 143.754,79.481 h1.3
  text "W" at 145.49,79.481 h1.3
  text "E" at 146.633,79.481 h1.3
  text "R" at 147.903,79.481 h1.3
  text "E" at 149.089,79.481 h1.3
  text "H" at 150.359,79.481 h1.3
  text "DATE" at -232.114,77.511 h1.5
  text "REV" at -170.646,77.511 h1.5
  text "ZONE" at -162.264,77.511 h1.5
  text "E" at 105.45,77.449 h1.3
  text "R" at 106.72,77.449 h1.3
  text "A" at 107.906,77.449 h1.3
  text "S" at 109.558,77.449 h1.3
  text "T" at 110.658,77.449 h1.3
  text "H" at 111.886,77.449 h1.3
  text "G" at 113.284,77.449 h1.3
  text "I" at 113.792,77.449 h1.3
  text "R" at 115.02,77.449 h1.3
  text "O" at 116.925,77.449 h1.3
  text "N" at 118.196,77.449 h1.3
  text "." at 119.17,77.449 h1.3
  text "E" at 120.355,77.449 h1.3
  text "L" at 121.329,77.449 h1.3
  text "O" at 122.726,77.449 h1.3
  text "H" at 123.954,77.449 h1.3
  text "W" at 125.69,77.449 h1.3
  text "N" at 127.384,77.449 h1.3
  text "I" at 127.892,77.449 h1.3
  text "D" at 129.628,77.449 h1.3
  text "E" at 130.814,77.449 h1.3
  text "T" at 131.915,77.449 h1.3
  text "U" at 133.185,77.449 h1.3
  text "B" at 134.371,77.449 h1.3
  text "I" at 134.879,77.449 h1.3
  text "R" at 136.107,77.449 h1.3
  text "T" at 137.19,77.449 h1.3
  text "S" at 138.376,77.449 h1.3
  text "I" at 138.842,77.449 h1.3
  text "D" at 140.112,77.449 h1.3
  text "Y" at 141.806,77.449 h1.3
  text "L" at 142.78,77.449 h1.3
  text "E" at 143.965,77.449 h1.3
  text "E" at 145.109,77.449 h1.3
  text "R" at 146.379,77.449 h1.3
  text "F" at 147.48,77.449 h1.3
  text "E" at 149.174,77.449 h1.3
  text "B" at 150.359,77.449 h1.3
  text "APPROVED" at -244.941,77.384 h1.5
  text "DESCRIPTION" at -196.427,77.384 h1.5
  text "." at 101.59,75.416 h1.3
  text "N" at 102.818,75.416 h1.3
  text "E" at 104.004,75.416 h1.3
  text "V" at 105.189,75.416 h1.3
  text "I" at 105.698,75.416 h1.3
  text "G" at 107.095,75.416 h1.3
  text "E" at 108.651,75.416 h1.3
  text "E" at 109.836,75.416 h1.3
  text "T" at 110.937,75.416 h1.3
  text "N" at 112.165,75.416 h1.3
  text "A" at 113.351,75.416 h1.3
  text "R" at 114.621,75.416 h1.3
  text "A" at 115.807,75.416 h1.3
  text "W" at 117.543,75.416 h1.3
  text "D" at 119.237,75.416 h1.3
  text "E" at 120.422,75.416 h1.3
  text "I" at 120.93,75.416 h1.3
  text "L" at 121.862,75.416 h1.3
  text "P" at 123.048,75.416 h1.3
  text "M" at 124.53,75.416 h1.3
  text "I" at 125.038,75.416 h1.3
  text "R" at 126.774,75.416 h1.3
  text "O" at 128.171,75.416 h1.3
  text "S" at 129.823,75.416 h1.3
  text "S" at 131.008,75.416 h1.3
  text "E" at 132.194,75.416 h1.3
  text "R" at 133.464,75.416 h1.3
  text "P" at 134.65,75.416 h1.3
  text "X" at 135.793,75.416 h1.3
  text "E" at 136.979,75.416 h1.3
  text "R" at 138.757,75.416 h1.3
  text "O" at 140.154,75.416 h1.3
  text "D" at 141.891,75.416 h1.3
  text "E" at 143.076,75.416 h1.3
  text "V" at 144.262,75.416 h1.3
  text "R" at 145.532,75.416 h1.3
  text "E" at 146.718,75.416 h1.3
  text "S" at 147.903,75.416 h1.3
  text "E" at 149.089,75.416 h1.3
  text "R" at 150.359,75.416 h1.3
  text "ORIGINAL" at -198.332,74.082 h1.5
  text "A" at -171.408,74.082 h1.5
  text "A" at -259.623,64.14 h1.2
  text "A" at 152.377,64.14 h1.2
  text "B" at -259.623,31.14 h1.2
  text "B" at 152.377,31.14 h1.2
  text "C" at -259.623,-4.735 h1.2
  text "C" at 152.377,-4.735 h1.2
  text "D" at -259.623,-40.61 h1.2
  text "D" at 152.377,-40.61 h1.2
  text "E" at -259.623,-76.485 h1.2
  text "E" at 152.377,-76.485 h1.2
  text "F" at -259.623,-112.36 h1.2
  text "F" at 152.377,-112.36 h1.2
  text "DATE" at -170.62,-147.798 h1.2
  text "PROJECT" at -145.776,-147.798 h1.2
  text ".pcb_organization" at -226.983,-147.872 h1.2
  text "G" at -259.623,-148.235 h1.2
  text "G" at 152.377,-148.235 h1.2
  text "BOARD:" at -127.148,-149.83 h1.2
  text ".pcb_address1" at -226.983,-150.158 h1.2
  text ".prj_date" at -167.318,-151.862 h1
  text ".prj_name" at -129.026,-151.862 h1.25
  text ".pcb_address2" at -226.983,-152.444 h1.2
  text "'.pcb_address3' - '.pcb_address4'" at -226.983,-154.73 h1.2
  text "STATUS:" at -127.148,-154.91 h1.2
  text "-  '.prj_status' -" at -129.076,-157.34 h1.5
  text "TITLE:" at -179.104,-157.725 h1.2
  text "VARIANT:" at -127.148,-159.99 h1.2
  text ".prj_part_number" at -105.16,-160.676 h1.2
  text "PART NO." at -92.206,-160.676 h1.2
  text ".prj_name_long" at -183.422,-161.535 h2.54
  text ".VariantName" at -129.026,-162.59 h1.25
  text ".pcb_part_number" at -105.16,-162.782 h1.2
  text "PCB PART NO." at -92.206,-162.782 h1.2
  text "DWG. NO." at -259.507,-163.462 h0.8 r90
  text "UNLESS OTHERWISE SPECIFIED DIMENSIONS" at -92.714,-165.449 h1.1
  text "DATE" at -170.62,-165.502 h1.2
  text "APPROVALS" at -145.776,-165.502 h1.2
  text ".pcb_title1" at -183.422,-166.708 h2.54
  text ".PCB_DWG_NO" at -257.836,-166.772 h1.27 r90
  text "AND TOLERANCE ARE IN INCHES AND" at -94.111,-167.354 h1.1
  text "DESIGNER:" at -127.148,-167.534 h1.2
  text "APPLY TO THE FINISHED PART" at -96.905,-169.132 h1.1
  text ".PCB_DESIGNER_APP_DATE" at -167.318,-169.566 h1
  text ".PCB_DESIGNER" at -129.026,-169.566 h1.25
  text ".pcb_title2" at -183.422,-170.845 h2.54
  text "TOLERANCE ON:" at -103.001,-172.307 h1.2
  text "ENGINEER:" at -127.148,-172.614 h1.2
  text ".PCB_ENGINEER_APP_DATE" at -167.318,-174.392 h1
  text "ANGLES" at -117.86,-174.593 h1
  text "3 DEC. PLACE" at -104.271,-174.593 h1
  text "2 DEC. PLACE" at -92.714,-174.593 h1
  text ".PCB_ENGINEER" at -129.026,-174.646 h1.25
  text "LICENSE:" at -179.104,-175.101 h1.2
  text "CHECKER:" at -127.148,-177.694 h1.2
  text ".PCB_ANG_TOL" at -116.971,-178.53 h1.5
  text ".PCB_3_DEC_TOL" at -105.16,-178.53 h1.5
  text ".PCB_2_DEC_TOL" at -94.111,-178.53 h1.5
  text ".prj_license" at -183.672,-178.96 h2.54
  text ".PCB_CHECKER_APP_DATE" at -167.267,-179.573 h1
  text ".PCB_CHECKER" at -129.026,-179.726 h1.25
  text "THIRD ANGLE PROJECTION" at -73.08,-180.056 h1
  text "MATERIAL:" at -92.714,-182.164 h1.2
  text "LAYER:" at -179.104,-183.178 h1.2
  text "REFERENCE DOCUMENTS" at -143.3,-183.282 h1.2
  text "H" at 152.377,-184.11 h1.2
  text "BOM:" at -127.148,-185.822 h1.2
  text "SEE NOTES" at -102.01,-187.219 h1.5
  text "REV:" at -259.586,-188.022 h0.8 r90
  text ".DOC_NO_BOM" at -129.276,-188.108 h1.5
  text ".prj_pcb" at -258.086,-188.272 h1.27 r90
  text "ASSY DWG:" at -127.148,-190.648 h1.2
  text ".DOC_NO_ASSY_DWG" at -129.276,-192.934 h1.5
  text "REV:" at -251.875,-193.77 h1.2
  text "DWG NO:" at -212.251,-193.77 h1.2
  text "CAGE CODE:" at -186.851,-193.77 h1.2
  text "SIZE:" at -180.628,-193.77 h1.2
  text "FAB DWG:" at -127.148,-195.474 h1.2
  text ".PCB_DWG_NO" at -217.586,-197.426 h2.54
  text ".DOC_NO_FAB_DWG" at -129.276,-197.633 h1.5
  text ".prj_pcb" at -253.198,-197.695 h2.54
  text ".CAGE_CODE" at -191.169,-197.707 h2.54
  text "A3" at -180.476,-197.695 h2.54
  text "SCHEMATIC:" at -127.148,-200.3 h1.2
  text "PRINT DATE:" at -92.511,-200.325 h1.2
  text "SHEET:" at -238.667,-201.773 h1.2
  text "FILE NAME:" at -194.471,-201.773 h1.2
  text "SCALE:" at -179.104,-201.771 h1.2
  text ".DOC_NO_SCH_DWG" at -129.276,-202.586 h1.5
  text "'.Print_Date', '.Print_Time'" at -95.086,-202.676 h1.5
  text ".PCB_FILE_NAME_NO_PATH" at -203.183,-202.916 h1.5
  text "OF" at -250.097,-203.043 h1.2
  text ".PCB_SCALE" at -185.962,-203.041 h1.5
  text "DOC-104 REV A" at 150.664,-204.717 h0.55
  text "16" at -248.623,-205.86 h1.2
  text "15" at -218.623,-205.86 h1.2
  text "14" at -193.623,-205.86 h1.2
  text "13" at -168.623,-205.86 h1.2
  text "12" at -143.623,-205.86 h1.2
  text "11" at -118.623,-205.86 h1.2
  text "10" at -93.623,-205.86 h1.2
  text "9" at -68.623,-205.86 h1.2
  text "8" at -39.623,-205.86 h1.2
  text "7" at -12.623,-205.86 h1.2
  text "6" at 12.377,-205.86 h1.2
  text "5" at 37.377,-205.86 h1.2
  text "4" at 62.377,-205.86 h1.2
  text "3" at 87.377,-205.86 h1.2
  text "2" at 112.377,-205.86 h1.2
  text "1" at 139.377,-205.86 h1.2
Drawing3:
  drawing of 1524 lines, arcs and shapes, not listed
Mechanical 22:
  drawing of 996 lines, arcs and shapes, not listed
Mechanical 23:
  lines w0.015: -10.916,18.88 -12.001,20.329 cw(c-3.999,26.326) -5.611,36.195 ; -9.715,19.779 -10.801,21.228 cw(c-3.999,26.326) -5.369,34.714 ; -5.208,33.727 ccw(c-3.999,26.326) -4.375,18.835 cw(c-4.476,16.837) -2.502,17.16
  lines w0.2: -4.001,27.6 -4.001,26.344 -1.102,26.344 ; -3.999,27.581 -3.999,26.326 -1.1,26.326
Mechanical 25:
  drawing of 45465 lines, arcs and shapes, not listed

## Text inside footprints (layer, text, board x,y; h text height)
J1: Note Top "1" at -49.43,29.764 h0.8 r81; Assembly Top "1" at -49.43,29.764 h0.8 r81
J2: Assembly Top "1" at -134.649,-42.541 h0.5 r180
JP1: Note Bottom "1" at -10.546,34.699 h0.25 r351; Assembly Bottom "1" at -10.546,34.699 h0.25 r351
K00_D1: Note Bottom "k" at -3.25,-24.85 h0.5 r270; Assembly Bottom "k" at -3.25,-24.85 h0.5 r270
K00_S1: Note Top "1" at -4.1,3.79 h0.8; Assembly Top "1" at -4.1,3.79 h0.8
K01_D1: Note Bottom "k" at -0.25,-24.85 h0.5 r270; Assembly Bottom "k" at -0.25,-24.85 h0.5 r270
K01_S1: Note Top "1" at -4.1,-15.26 h0.8; Assembly Top "1" at -4.1,-15.26 h0.8
K02_D1: Note Bottom "k" at 2.75,-24.85 h0.5 r270; Assembly Bottom "k" at 2.75,-24.85 h0.5 r270
K02_S1: Note Top "1" at -4.1,-34.31 h0.8; Assembly Top "1" at -4.1,-34.31 h0.8
K03_D1: Note Bottom "k" at 5.75,-24.85 h0.5 r270; Assembly Bottom "k" at 5.75,-24.85 h0.5 r270
K03_S1: Note Top "1" at -4.1,-53.36 h0.8; Assembly Top "1" at -4.1,-53.36 h0.8
K10_D1: Note Bottom "k" at -18.25,-24.85 h0.5 r270; Assembly Bottom "k" at -18.25,-24.85 h0.5 r270
K10_S1: Note Top "1" at -23.15,3.79 h0.8; Assembly Top "1" at -23.15,3.79 h0.8
K11_D1: Note Bottom "k" at -15.25,-24.85 h0.5 r270; Assembly Bottom "k" at -15.25,-24.85 h0.5 r270
K11_S1: Note Top "1" at -23.15,-15.26 h0.8; Assembly Top "1" at -23.15,-15.26 h0.8
K12_D1: Note Bottom "k" at -12.25,-24.85 h0.5 r270; Assembly Bottom "k" at -12.25,-24.85 h0.5 r270
K12_S1: Note Top "1" at -23.15,-34.31 h0.8; Assembly Top "1" at -23.15,-34.31 h0.8
K13_D1: Note Bottom "k" at -9.25,-24.85 h0.5 r270; Assembly Bottom "k" at -9.25,-24.85 h0.5 r270
K13_S1: Note Top "1" at -23.15,-53.36 h0.8; Assembly Top "1" at -23.15,-53.36 h0.8
K14_D1: Note Bottom "k" at -6.25,-24.85 h0.5 r270; Assembly Bottom "k" at -6.25,-24.85 h0.5 r270
K14_S1: Note Top "1" at -18.382,-74.316 h0.8; Assembly Top "1" at -18.382,-74.316 h0.8
K20_D1: Note Bottom "k" at -33.25,-24.85 h0.5 r270; Assembly Bottom "k" at -33.25,-24.85 h0.5 r270
K20_S1: Note Top "1" at -42.2,3.79 h0.8; Assembly Top "1" at -42.2,3.79 h0.8
K21_D1: Note Bottom "k" at -30.25,-24.85 h0.5 r270; Assembly Bottom "k" at -30.25,-24.85 h0.5 r270
K21_S1: Note Top "1" at -42.2,-15.26 h0.8; Assembly Top "1" at -42.2,-15.26 h0.8
K22_D1: Note Bottom "k" at -27.25,-24.85 h0.5 r270; Assembly Bottom "k" at -27.25,-24.85 h0.5 r270
K22_S1: Note Top "1" at -42.2,-34.31 h0.8; Assembly Top "1" at -42.2,-34.31 h0.8
K23_D1: Note Bottom "k" at -24.25,-24.85 h0.5 r270; Assembly Bottom "k" at -24.25,-24.85 h0.5 r270
K23_S1: Note Top "1" at -42.2,-53.36 h0.8; Assembly Top "1" at -42.2,-53.36 h0.8
K24_D1: Note Bottom "k" at -21.25,-24.85 h0.5 r270; Assembly Bottom "k" at -21.25,-24.85 h0.5 r270
K24_S1: Note Top "1" at -49.338,-74.316 h0.8; Assembly Top "1" at -49.338,-74.316 h0.8
K30_D1: Note Bottom "k" at -45.25,-24.85 h0.5 r270; Assembly Bottom "k" at -45.25,-24.85 h0.5 r270
K30_S1: Note Top "1" at -61.25,3.79 h0.8; Assembly Top "1" at -61.25,3.79 h0.8
K31_D1: Note Bottom "k" at -42.25,-24.85 h0.5 r270; Assembly Bottom "k" at -42.25,-24.85 h0.5 r270
K31_S1: Note Top "1" at -61.25,-15.26 h0.8; Assembly Top "1" at -61.25,-15.26 h0.8
K32_D1: Note Bottom "k" at -39.25,-24.85 h0.5 r270; Assembly Bottom "k" at -39.25,-24.85 h0.5 r270
K32_S1: Note Top "1" at -61.25,-34.31 h0.8; Assembly Top "1" at -61.25,-34.31 h0.8
K33_D1: Note Bottom "k" at -36.25,-24.85 h0.5 r270; Assembly Bottom "k" at -36.25,-24.85 h0.5 r270
K33_S1: Note Top "1" at -61.25,-53.36 h0.8; Assembly Top "1" at -61.25,-53.36 h0.8
K40_D1: Note Bottom "k" at -60.25,-24.85 h0.5 r270; Assembly Bottom "k" at -60.25,-24.85 h0.5 r270
K40_S1: Note Top "1" at -80.3,3.79 h0.8; Assembly Top "1" at -80.3,3.79 h0.8
K41_D1: Note Bottom "k" at -57.25,-24.85 h0.5 r270; Assembly Bottom "k" at -57.25,-24.85 h0.5 r270
K41_S1: Note Top "1" at -80.3,-15.26 h0.8; Assembly Top "1" at -80.3,-15.26 h0.8
K42_D1: Note Bottom "k" at -54.25,-24.85 h0.5 r270; Assembly Bottom "k" at -54.25,-24.85 h0.5 r270
K42_S1: Note Top "1" at -80.3,-34.31 h0.8; Assembly Top "1" at -80.3,-34.31 h0.8
K43_D1: Note Bottom "k" at -51.25,-24.85 h0.5 r270; Assembly Bottom "k" at -51.25,-24.85 h0.5 r270
K43_S1: Note Top "1" at -80.3,-53.36 h0.8; Assembly Top "1" at -80.3,-53.36 h0.8
K44_D1: Note Bottom "k" at -48.25,-24.85 h0.5 r270; Assembly Bottom "k" at -48.25,-24.85 h0.5 r270
K44_S1: Note Top "1" at -73.151,-74.316 h0.8; Assembly Top "1" at -73.151,-74.316 h0.8
K50_D1: Note Bottom "k" at -72.25,-24.85 h0.5 r270; Assembly Bottom "k" at -72.25,-24.85 h0.5 r270
K50_S1: Note Top "1" at -99.35,3.79 h0.8; Assembly Top "1" at -99.35,3.79 h0.8
K51_D1: Note Bottom "k" at -78.25,-24.85 h0.5 r270; Assembly Bottom "k" at -78.25,-24.85 h0.5 r270
K51_S1: Note Top "1" at -104.106,-15.26 h0.8; Assembly Top "1" at -104.106,-15.26 h0.8
K52_D1: Note Bottom "k" at -69.25,-24.85 h0.5 r270; Assembly Bottom "k" at -69.25,-24.85 h0.5 r270
K52_S1: Note Top "1" at -107.029,-34.304 h0.8; Assembly Top "1" at -107.029,-34.304 h0.8
K53_D1: Note Bottom "k" at -66.25,-24.85 h0.5 r270; Assembly Bottom "k" at -66.25,-24.85 h0.5 r270
K53_S1: Note Top "1" at -101.726,-53.36 h0.8; Assembly Top "1" at -101.726,-53.36 h0.8
K54_D1: Note Bottom "k" at -63.25,-24.85 h0.5 r270; Assembly Bottom "k" at -63.25,-24.85 h0.5 r270
K54_S1: Note Top "1" at -101.726,-74.316 h0.8; Assembly Top "1" at -101.726,-74.316 h0.8
K60_D1: Note Bottom "k" at -84.25,-24.85 h0.5 r270; Assembly Bottom "k" at -84.25,-24.85 h0.5 r270
K60_S1: Note Top "1" at -123.35,6.79 h0.8; Assembly Top "1" at -123.35,6.79 h0.8
K63_D1: Note Bottom "k" at -75.25,-24.85 h0.5 r270; Assembly Bottom "k" at -75.25,-24.85 h0.5 r270
K63_S1: Note Top "1" at -130.112,-53.36 h0.8; Assembly Top "1" at -130.112,-53.36 h0.8
K64_D1: Note Bottom "k" at -81.25,-24.85 h0.5 r270; Assembly Bottom "k" at -81.25,-24.85 h0.5 r270
K64_S1: Note Top "1" at -130.112,-74.316 h0.8; Assembly Top "1" at -130.112,-74.316 h0.8
U1: Top Overlay "3.3V" at -53.426,20.229 h1 r81; Top Overlay "GND" at -55.935,20.568 h1 r81; Top Overlay "5V" at -58.387,21.286 h1 r81; Note Top "1" at -55.82,38.805 h0.8 r81; Assembly Top "1" at -55.82,38.805 h0.8 r81